# EAGLE board PBRCX (EAGLE 6.3)
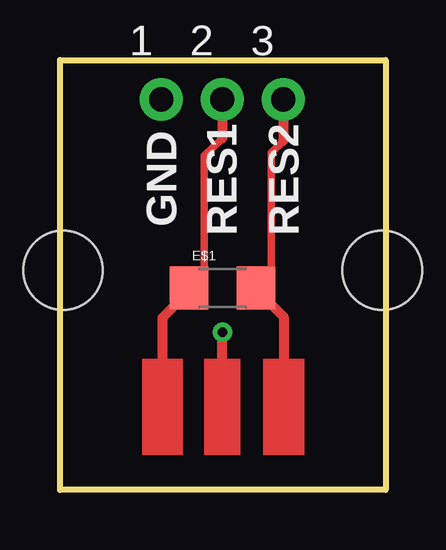
[diagram p0: board, top side]
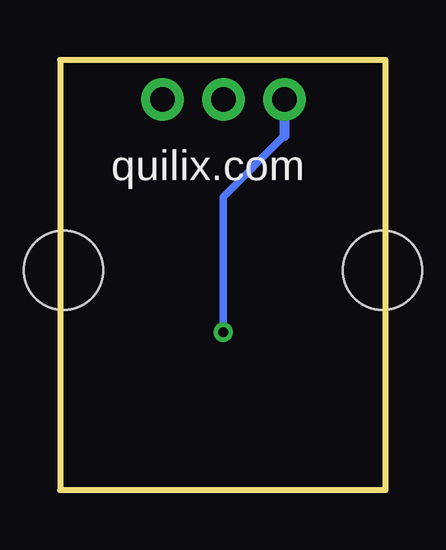
[diagram p1: board, bottom side, seen from below]

Size 13.57 x 17.93 mm. Coordinates in mm from the lower left corner, seen from the top.
Outline: 0,0 0,17.93 13.57,17.93 13.57,0 0,0
Copper layers (1*16): Top 0.035mm / dielectric 1.5mm / Bottom 0.035mm
Design rules "default": minimum track width 10mil, minimum drill 24mil, track to track 8mil, track to pad 8mil, pad to pad 8mil, via to via 8mil, smd to smd 8mil, copper to edge 40mil, drill to drill 8mil, minimum pad ring 10mil, minimum via ring 8mil, stop-mask expansion 4mil, vias tented up to drill 0mil, thermal gap 10mil

## Footprints (pad centres in the part's own frame; a part is rotated, then mirrored left to right if it is on the bottom)
1X01-CLEANBIG = drill 1.016 pad 1.778: 1 0,0
1206 = smd 1.6 x 1.8: 1 -1.4,0; 2 1.4,0
STAND-OFF = hole 3.302: 0,0

## Placement (x,y rotation side)
1  [1X01-CLEANBIG]  4.22,16.28 0 top
2  [1X01-CLEANBIG]  6.76,16.28 0 top
3  [1X01-CLEANBIG]  9.3,16.28 0 top
E$1  [1206]  6.77,8.42 0 top
JP3  STAND-OFF  [STAND-OFF]  13.43,9.16 0 top
JP4  STAND-OFF  [STAND-OFF]  0.13,9.16 0 top

## Library data of the parts
1-3 = adafruit
E$1 JP3 JP4 = SparkFun

## Nets
S$1: 3.1

## Tracks (layer width: path | path; a pad name or v marks a point on that pad's centre or on a via)
D-
  Top 0.305: 6.75,14.65 6.01,13.94 6.01,8.72
  Top 0.406: 6.75,16.25 6.75,14.65
S$1
  Top 0.305: 9.3,14.55 8.81,14.06 8.81,8.12
  Top 0.406: 3.1 9.3,14.55
S$2  (via drill 0.4)
  other vias: 6.77,6.57
S$3
  Bottom 0.305: 4.22,14.77 6.77,12.22 6.77,6.52
  Bottom 0.406: 4.22,16.27 4.22,14.77
S$4
  Top 0.305: 6.77,5.17 6.77,5.22
  Top 0.406: 6.77,5.22 6.77,6.57
S$5
  Top 0.406: 4.77,7.67 4.27,7.17 4.27,5.02
S$6
  Top 0.406: 8.82,7.72 9.32,7.22 9.32,5.02
(copper drawn outside any net)
  shapes: Top area x3

## Text on the board
_tsilk: GND | RES1 | RES2
_bsilk: quilix.com